# EAGLE board ir_imu_v (EAGLE 4.16)
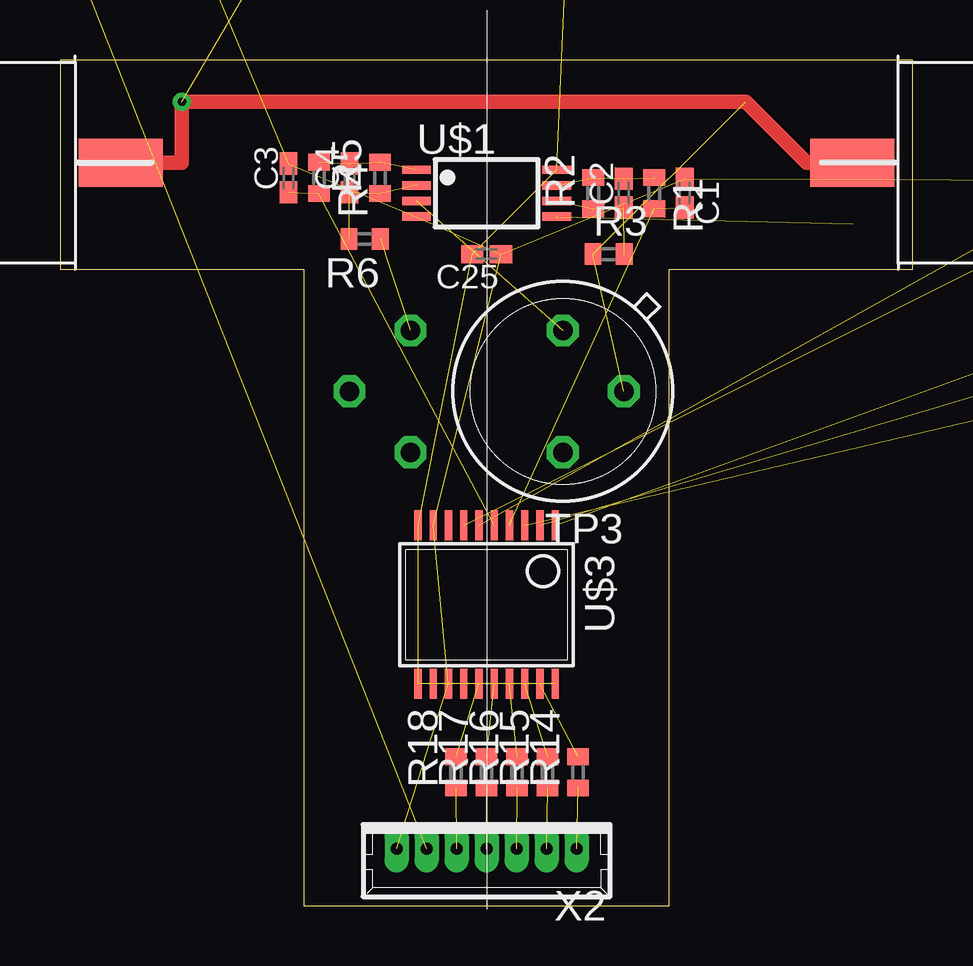
[diagram p0: board, top side]
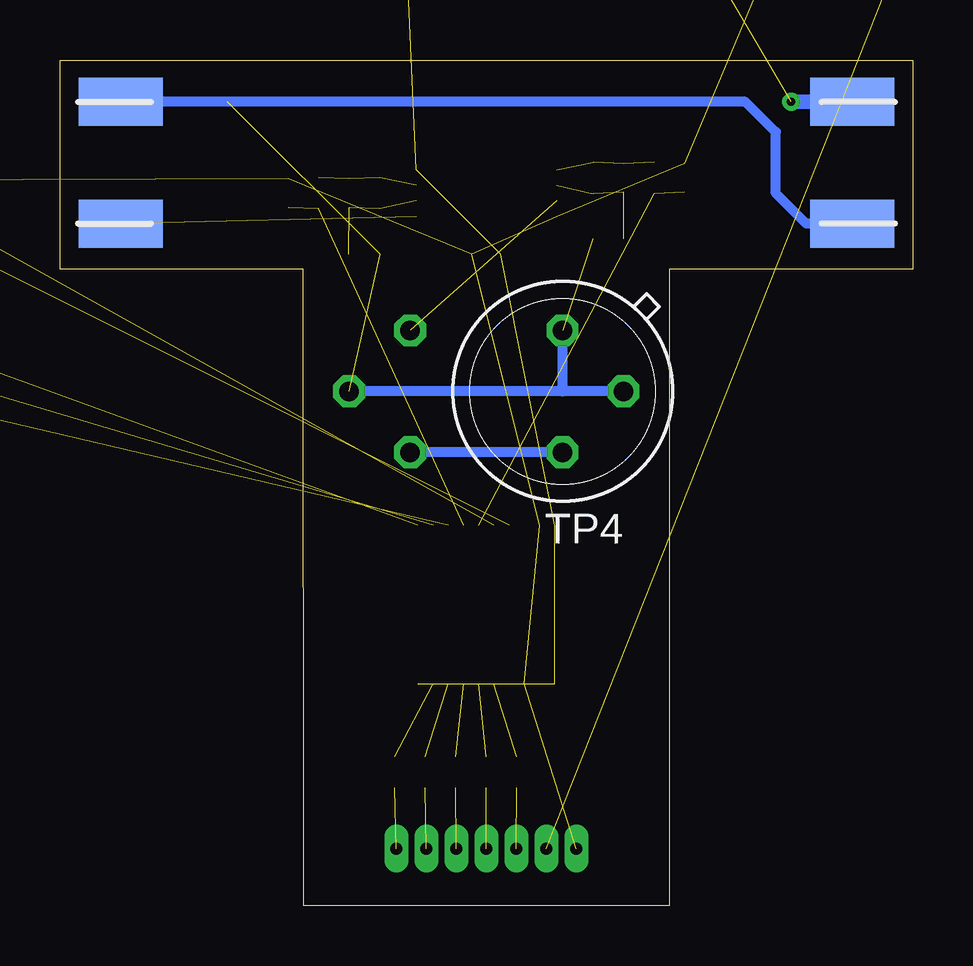
[diagram p1: board, bottom side, seen from below]

Size 35.54 x 35.23 mm. Coordinates in mm from the lower left corner, seen from the top.
Outline: 10.16,0 25.38,0 25.39,26.5 35.54,26.5 35.54,35.23 0,35.23 0,26.5 10.15,26.5 10.16,0
Copper layers (1*16): Top 0.035mm / dielectric 1.5mm / Bottom 0.035mm
Design rules "default": minimum track width 10mil, minimum drill 24mil, track to track 8mil, track to pad 8mil, pad to pad 8mil, via to via 8mil, smd to smd 8mil, copper to edge 40mil, drill to drill 8mil, minimum pad ring 10mil, minimum via ring 8mil, stop-mask expansion 4mil, vias tented up to drill 0mil, thermal gap 10mil

## Footprints (pad centres in the part's own frame; a part is rotated, then mirrored left to right if it is on the bottom)
C0402K = smd 0.925 x 0.74: 1 -0.6,0; 2 0.6,0
SMC_A = smd 1.6 x 1.4: + -1.5,0; - 1.5,0
SOT23-5 = smd 0.55 x 1.2: 1 -0.95,-1.3; 2 0,-1.3; 3 0.95,-1.3; 4 0.95,1.3; 5 -0.95,1.3
L2012C = smd 1 x 1: 1 -1,0; 2 1,0
R0402 = smd 0.7 x 0.9: 1 -0.65,0; 2 0.65,0
TO39H_SMD = smd 2 x 3.5 bottom: 1 2.54,-1.905; 3 -2.54,-1.905 | smd 2 x 3.5: 4 0,-1.905
TO39 = drill 0.813 octagon: 1 0,-2.54; 3 0,2.54; 4 -2.54,0
TSSOP8 = smd 0.35 x 1.2: 1 -0.975,-2.925; 2 -0.325,-2.925; 3 0.325,-2.925; 4 0.975,-2.925; 5 0.975,2.925; 6 0.325,2.925; 7 -0.325,2.925; 8 -0.975,2.925
IDG300 = smd 0.457 x 0.33: P$1 -2.794,2.286; P$2 -2.794,1.778; P$3 -2.794,1.27; P$4 -2.794,0.762; P$5 -2.794,0.254; P$6 -2.794,-0.254; P$7 -2.794,-0.762; P$8 -2.794,-1.27; P$9 -2.794,-1.778; P$10 -2.794,-2.286; P$21 2.794,-2.286; P$22 2.794,-1.778; P$23 2.794,-1.27; P$24 2.794,-0.762; P$25 2.794,-0.254; P$26 2.794,0.254; P$27 2.794,0.762; P$28 2.794,1.27; P$29 2.794,1.778; P$30 2.794,2.286 | smd 0.33 x 0.457: P$11 -2.286,-2.794; P$12 -1.778,-2.794; P$13 -1.27,-2.794; P$14 -0.762,-2.794; P$15 -0.254,-2.794; P$16 0.254,-2.794; P$17 0.762,-2.794; P$18 1.27,-2.794; P$19 1.778,-2.794; P$20 2.286,-2.794; P$31 2.286,2.794; P$32 1.778,2.794; P$33 1.27,2.794; P$34 0.762,2.794; P$35 0.254,2.794; P$36 -0.254,2.794; P$37 -0.762,2.794; P$38 -1.27,2.794; P$39 -1.778,2.794; P$40 -2.286,2.794
SSOP20 = smd 0.305 x 1.245: 1 -2.857,-3.302; 2 -2.222,-3.302; 3 -1.587,-3.302; 4 -0.952,-3.302; 5 -0.317,-3.302; 6 0.318,-3.302; 7 0.953,-3.302; 8 1.588,-3.302; 9 2.223,-3.302; 10 2.858,-3.302; 11 2.858,3.302; 12 2.223,3.302; 13 1.588,3.302; 14 0.953,3.302; 15 0.318,3.302; 16 -0.317,3.302; 17 -0.952,3.302; 18 -1.587,3.302; 19 -2.222,3.302; 20 -2.857,3.302
CASE162201 = smd 0.5 x 0.55: P$1 -1.5,-2.7; P$2 -0.5,-2.7; P$3 0.5,-2.7; P$4 1.5,-2.7; P$9 1.5,2.7; P$10 0.5,2.7; P$11 -0.5,2.7; P$12 -1.5,2.7 | smd 0.55 x 0.5: P$5 2.7,-1.5; P$6 2.7,-0.5; P$7 2.7,0.5; P$8 2.7,1.5; P$13 -2.7,1.5; P$14 -2.7,0.5; P$15 -2.7,-0.5; P$16 -2.7,-1.5 | smd 4.25 x 4.25: P$17 0,0
53047-07 = drill 0.5 pad 0.698 long: 1 3.75,0; 2 2.5,0; 3 1.25,0; 4 0,0; 5 -1.25,0; 6 -2.5,0; 7 -3.75,0

## Placement (x,y rotation side)
C1  100nF  [C0402K]  26.03,29.68 270 top
C2  100nF  [C0402K]  23.49,29.68 90 top
C3  100nF  [C0402K]  9.52,30.31 90 top
C4  100nF  [C0402K]  12.06,30.31 90 top
C5  100nF  [C0402K]  14.6,51.27 0 top  (outside the outline)
C6  100nF  [C0402K]  14.6,48.73 0 top  (outside the outline)
C7  100nF  [C0402K]  60.32,38.57 0 top  (outside the outline)
C8  100nF  [C0402K]  60.32,41.11 0 top  (outside the outline)
C9  100nF  [C0402K]  60.32,43.65 0 top  (outside the outline)
C10  220nF  [C0402K]  64.13,43.65 0 top  (outside the outline)
C11  220nF  [C0402K]  64.13,41.11 0 top  (outside the outline)
C12  100nF  [C0402K]  64.13,38.57 0 top  (outside the outline)
C13  100nF  [C0402K]  71.75,43.65 0 top  (outside the outline)
C14  100nF  [C0402K]  71.75,41.11 0 top  (outside the outline)
C15  100nF  [C0402K]  55.24,15.71 0 top  (outside the outline)
C16  100nF  [C0402K]  55.24,13.17 0 top  (outside the outline)
C17  470pf  [C0402K]  3.17,47.46 0 top  (outside the outline)
C18  [SMC_A]  6.98,51.27 90 top  (outside the outline)
C19  [SMC_A]  -0.64,51.27 90 top  (outside the outline)
C20  100nF  [C0402K]  55.24,33.49 0 top  (outside the outline)
C21  100nF  [C0402K]  66.67,30.95 0 top  (outside the outline)
C22  100nF  [C0402K]  66.67,28.41 0 top  (outside the outline)
C23  100nF  [C0402K]  66.67,25.87 0 top  (outside the outline)
C24  100nF  [C0402K]  55.24,18.25 0 top  (outside the outline)
C25  100nF  [C0402K]  17.77,27.14 180 top
C26  100nF  [C0402K]  22.22,51.27 0 top  (outside the outline)
IC1  MIC5205-3.3BM5  [SOT23-5]  3.17,51.27 0 top  (outside the outline)
L1  [L2012C]  -4.45,51.27 270 top  (outside the outline)
R1  200  [R0402]  24.76,29.68 270 top
R2  1.1M  [R0402]  22.22,29.68 90 top
R3  1K  [R0402]  22.85,27.14 0 top
R4  200  [R0402]  10.79,30.31 270 top
R5  1.1M  [R0402]  13.33,30.31 90 top
R6  1K  [R0402]  12.7,27.77 180 top
R7  1K  [R0402]  18.41,48.73 0 top  (outside the outline)
R8  1K  [R0402]  18.41,51.27 0 top  (outside the outline)
R9  750R  [R0402]  67.94,43.65 0 top  (outside the outline)
R10  750R  [R0402]  67.94,41.11 0 top  (outside the outline)
R11  750R  [R0402]  62.86,30.95 0 top  (outside the outline)
R12  750R  [R0402]  62.86,28.41 0 top  (outside the outline)
R13  750R  [R0402]  62.86,25.87 0 top  (outside the outline)
R14  100R  [R0402]  21.59,5.55 90 top
R15  100R  [R0402]  20.31,5.55 90 top
R16  100R  [R0402]  19.05,5.55 90 top
R17  100R  [R0402]  17.77,5.55 90 top
R18  100R  [R0402]  16.51,5.55 90 top
TP1  MLX90247TO39H_SMD  [TO39H_SMD]  0.63,30.95 90 top
TP2  MLX90247TO39H_SMD  [TO39H_SMD]  34.92,30.95 270 top
TP3  MLX90247V  [TO39]  20.95,21.42 180 top
TP4  MLX90247V  [TO39]  14.6,21.42 180 bottom
U$1  AD8552RU  [TSSOP8]  17.77,29.68 270 top
U$2  IDG300  [IDG300]  56.51,28.41 0 top  (outside the outline)
U$3  ADS8344  [SSOP20]  17.77,12.54 180 top
U$4  MMA7260  [CASE162201]  55.24,41.11 0 top  (outside the outline)
X2  [53047-07]  17.77,2.38 180 top

## Library data of the parts
C1-C26 L1 R1-R18 = rcl
IC1 = v-reg-micrel
TP1-TP4 U$1-U$4 = paparazzi
X2 = con-molex

## Nets
ACCEL_X: C23.2 R11.1 U$3.1
ACCEL_Y: C22.2 R12.1 U$3.2
ACCEL_Z: C21.2 R13.1 U$3.3
BUSY: R17.1 X2.4
FOO1: C19.+ IC1.1 IC1.3 L1.2
GND: C1.1 C3.2 C5.2 C6.2 C7.1 C8.1 C9.1 C10.1 C11.1 C12.1 C13.1 C14.1 C15.2 C16.2 C17.1 C18.- C19.- C20.1 C21.1 C22.1 C23.1 C24.1 C25.1 IC1.2 R7.1 U$1.4 U$2.P$2 U$2.P$22 U$2.P$25 U$2.P$38 U$2.P$39 U$2.P$40 U$3.9 U$3.13 U$3.14 U$4.P$4 X2.1
IR1: C1.2 R1.2 U$3.4
IR2: C3.1 R4.2 U$3.5
MISO: R18.1 X2.3
MOSI: R16.1 X2.5
N$1: TP3.3 TP4.3
N$2: R14.2 U$3.19
N$3: TP2.1 U$1.5
N$4: R15.2 U$3.18
N$5: C11.2 U$2.P$23
N$6: C2.2 R1.1 R2.2 U$1.7
N$7: C2.1 R2.1 R3.2 U$1.6
N$8: C4.2 R4.1 R5.2 U$1.1
N$9: C10.2 U$2.P$8
N$10: R9.2 U$2.P$3
N$11: TP3.1 U$1.3
N$12: R10.2 U$2.P$28
N$13: R11.2 U$4.P$15
N$14: R12.2 U$4.P$14
N$15: C12.2 U$2.P$17
N$16: C17.2 IC1.4
N$17: R16.2 U$3.17
N$18: R13.2 U$4.P$13
N$19: TP1.3 TP2.3
N$20: R17.2 U$3.16
N$21: R18.2 U$3.15
N$125: C4.1 R5.1 R6.2 U$1.2
RATE_X: C14.2 R9.1 U$3.6
RATE_Y: C13.2 R10.1 U$3.7
SCK: R14.1 X2.7
SS: R15.1 X2.6
VBAT: L1.1 X2.2
VCC: C5.1 C7.2 C8.2 C9.2 C15.1 C16.1 C18.+ C20.2 C24.2 C25.2 C26.1 IC1.5 R8.1 U$1.8 U$2.P$14 U$2.P$29 U$2.P$34 U$3.10 U$3.11 U$3.12 U$3.20 U$4.P$1 U$4.P$2 U$4.P$3 U$4.P$12
VCC/2: C6.1 C26.2 R3.1 R6.1 R7.2 R8.2 TP1.1 TP1.4 TP2.4 TP3.4 TP4.1 TP4.4

## Tracks (layer width: path | path; a pad name or v marks a point on that pad's centre or on a via)
ACCEL_X  (2 unrouted)
ACCEL_Y  (2 unrouted)
ACCEL_Z  (2 unrouted)
BUSY  (1 unrouted)
FOO1  (3 unrouted)
GND  (36 unrouted)
IR1  (2 unrouted)
IR2  (2 unrouted)
MISO  (1 unrouted)
MOSI  (1 unrouted)
N$1
  Bottom 0.406: TP4.3 TP3.3
N$2  (1 unrouted)
N$3  (1 unrouted)
N$4  (1 unrouted)
N$5  (1 unrouted)
N$6  (3 unrouted)
N$7  (3 unrouted)
N$8  (3 unrouted)
N$9  (1 unrouted)
N$10  (1 unrouted)
N$11  (1 unrouted)
N$12  (1 unrouted)
N$13  (1 unrouted)
N$14  (1 unrouted)
N$15  (1 unrouted)
N$16  (1 unrouted)
N$17  (1 unrouted)
N$18  (1 unrouted)
N$19
  Bottom 0.406: TP1.3 4.44,28.41 5.71,29.68 5.71,32.22 6.98,33.49 TP2.3
N$20  (1 unrouted)
N$21  (1 unrouted)
N$125  (3 unrouted)
RATE_X  (2 unrouted)
RATE_Y  (2 unrouted)
SCK  (1 unrouted)
SS  (1 unrouted)
VBAT  (1 unrouted)
VCC  (24 unrouted)
VCC/2  (via drill 0.35)  (7 unrouted)
  Top 0.61: TP1.4 5.08,30.95 v5.08,33.49 28.57,33.49 31.11,30.95 TP2.4
  Bottom 0.406: 14.6,21.42 TP3.4 | TP4.4 14.6,21.42 | 14.6,21.42 TP4.1
  Bottom 0.61: v5.08,33.49 TP1.1